# Altium PCB MODULIQ_RF_Detector.PcbDoc (part 1 of 2)
Units mm, origin at the board's own origin, x right, y up, seen from the top; angles counter-clockwise.
Board outline 24 x 76.5 mm, 4 copper layers (L1, P2, L3, L4), stack 1.512 mm thick; 99 components, 100 nets, 366 pads, 199 vias.
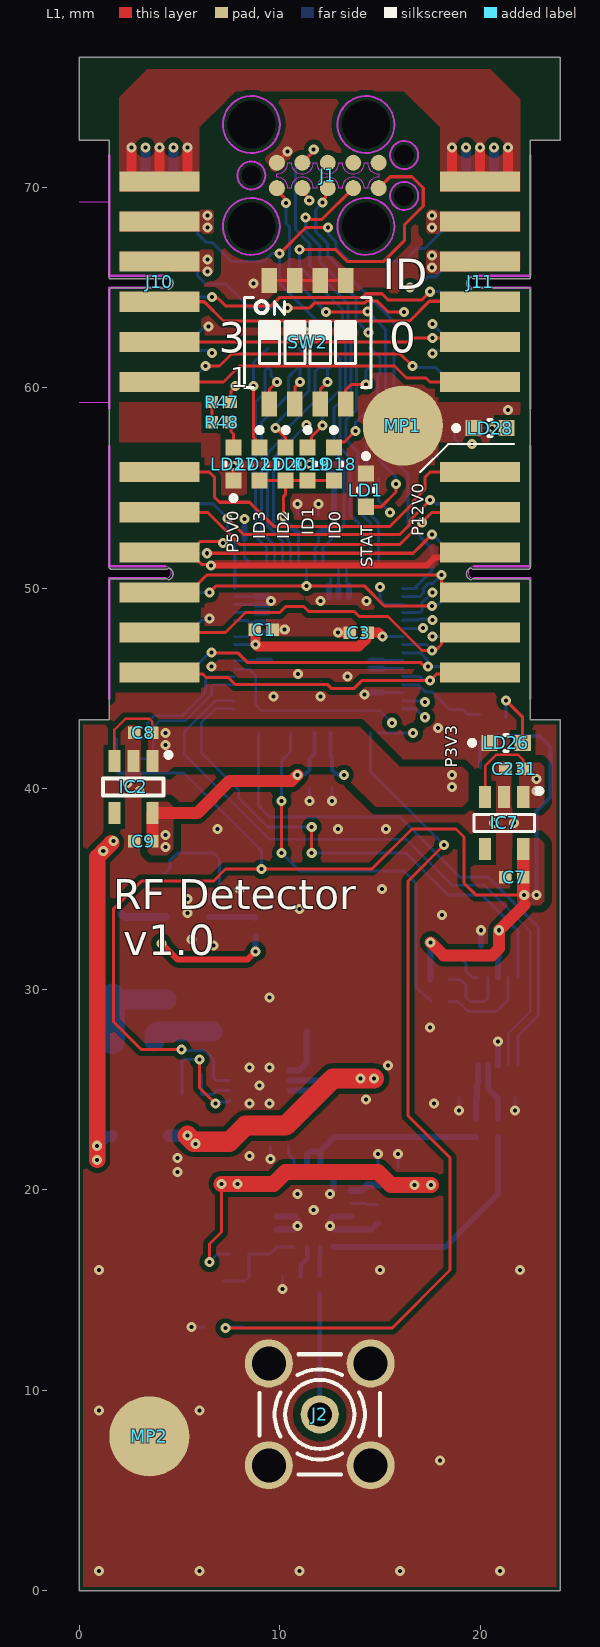
[diagram p0: L1 view]
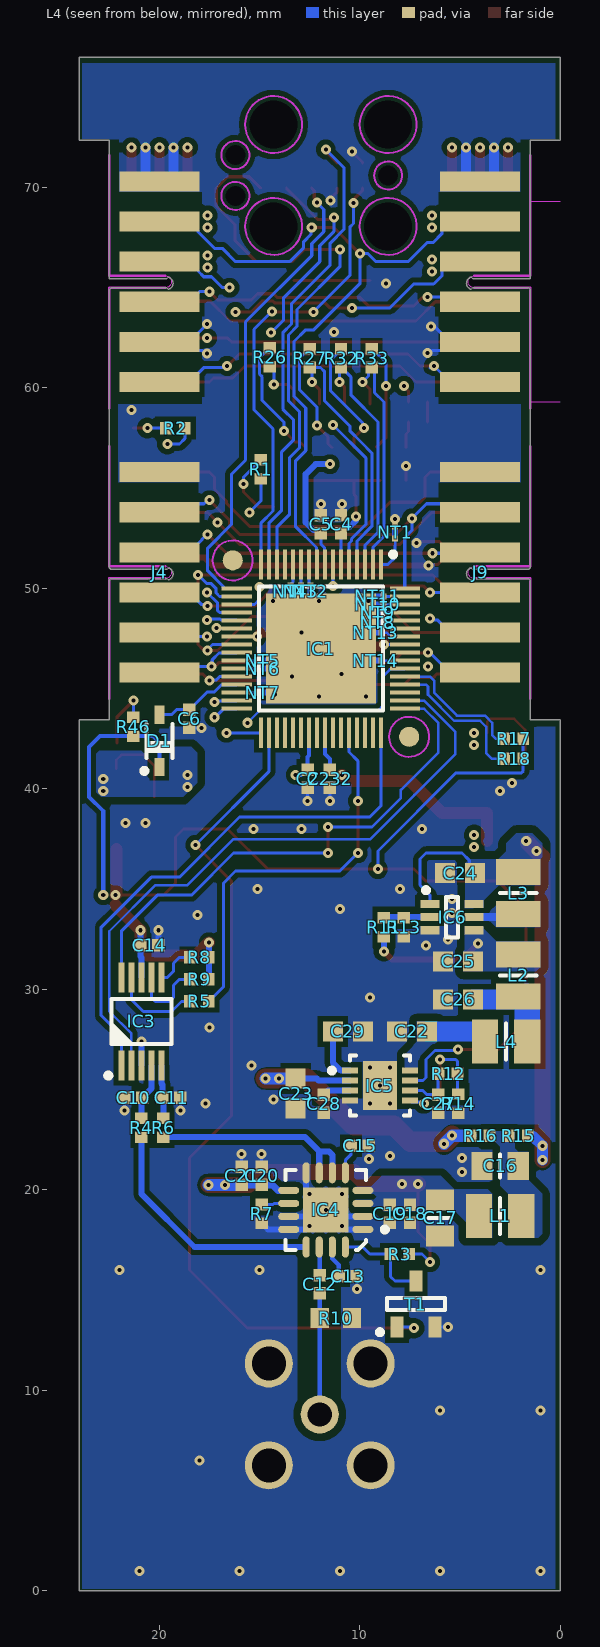
[diagram p1: L4 view, seen from below]
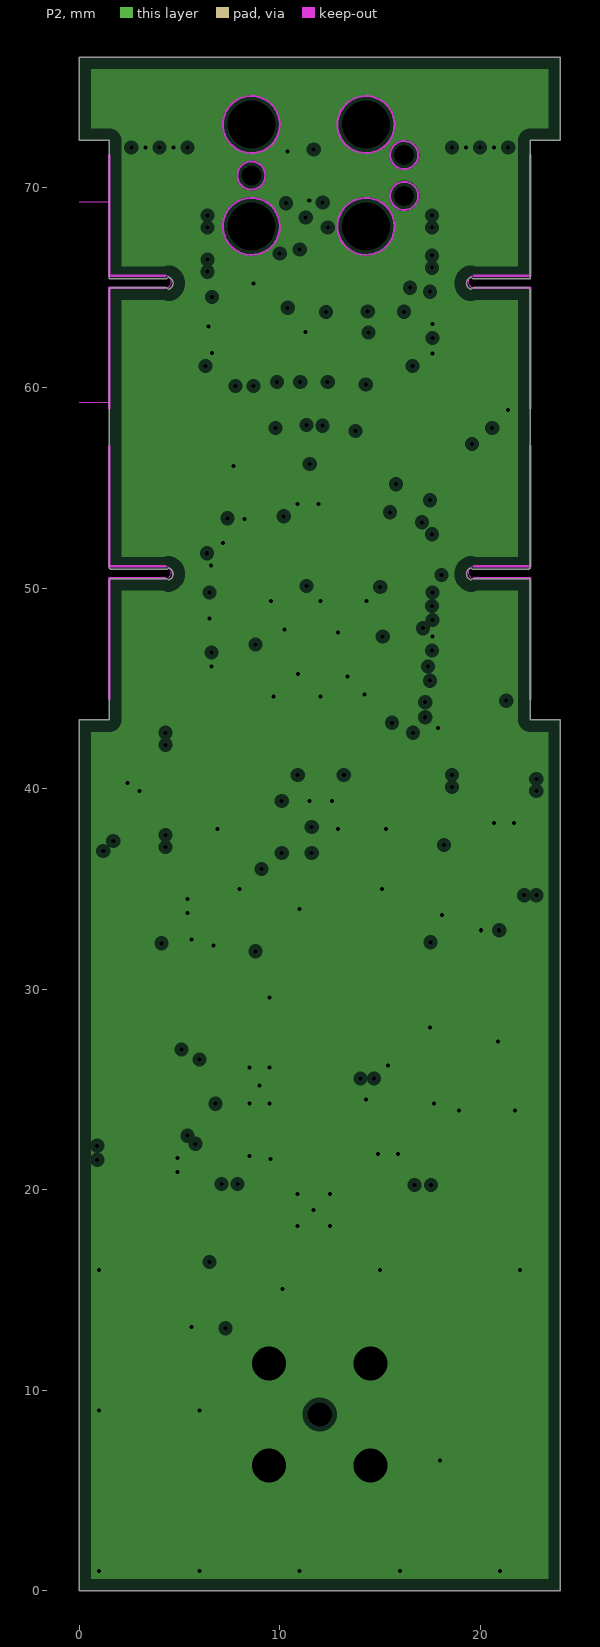
[diagram p2: P2, clearances drawn from the general rule]
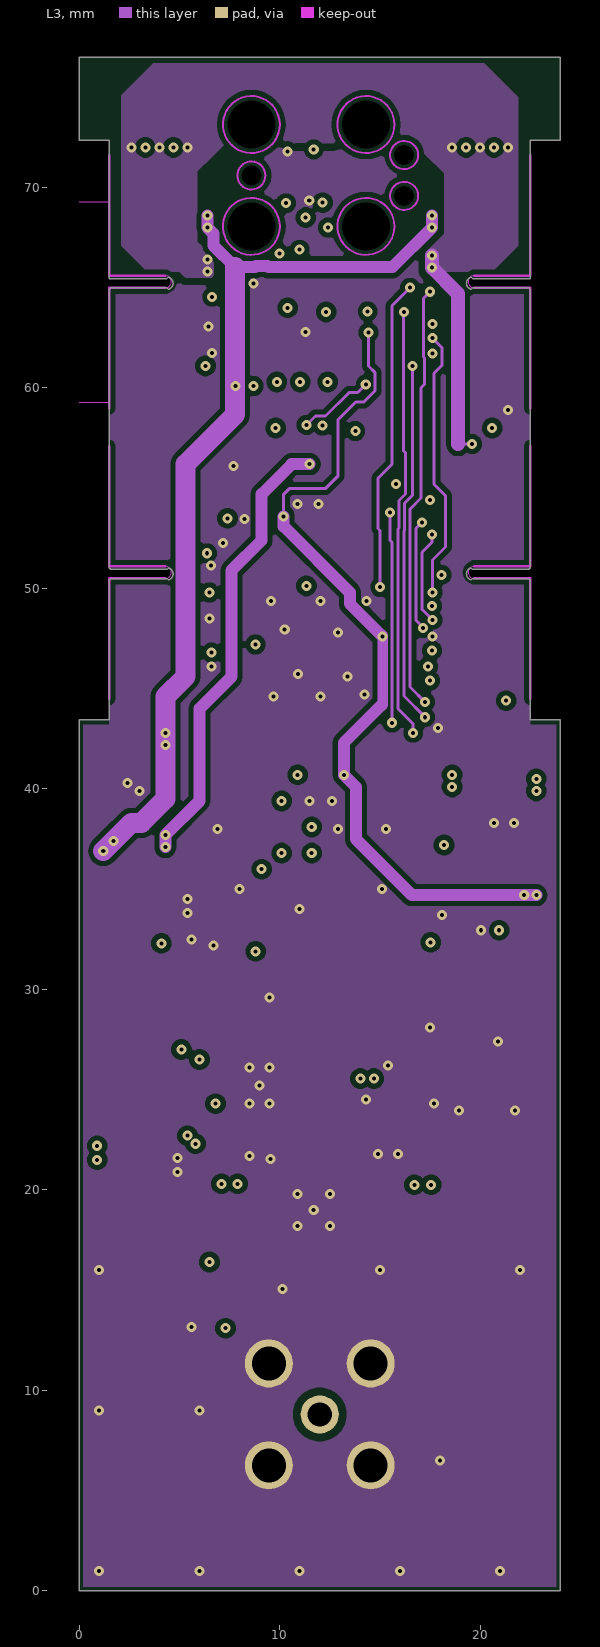
[diagram p3: L3]
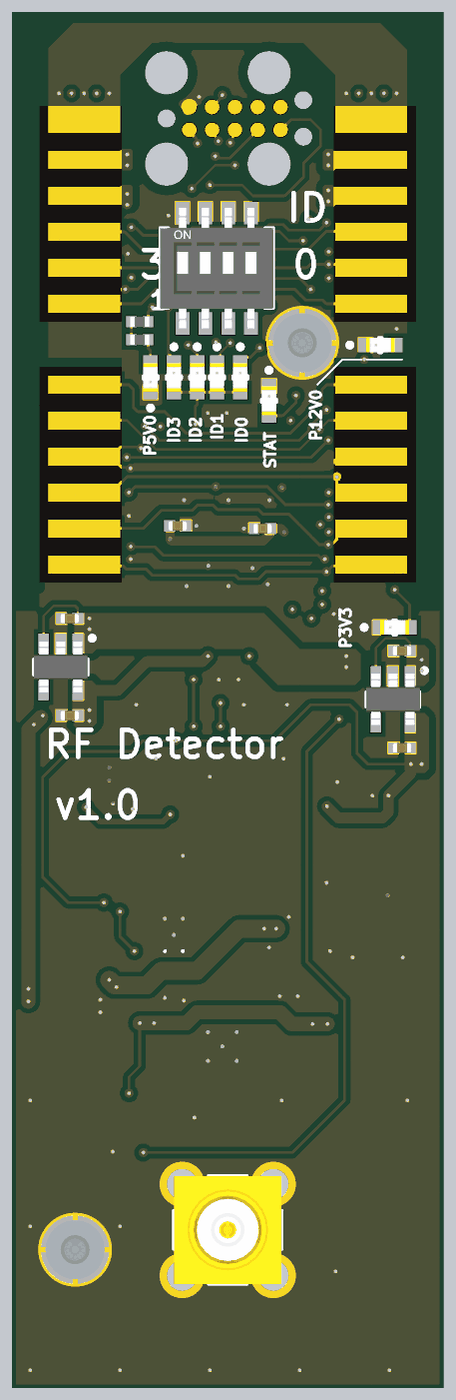
[diagram p5: 3D render of the assembled board from above, using the file's embedded part models]
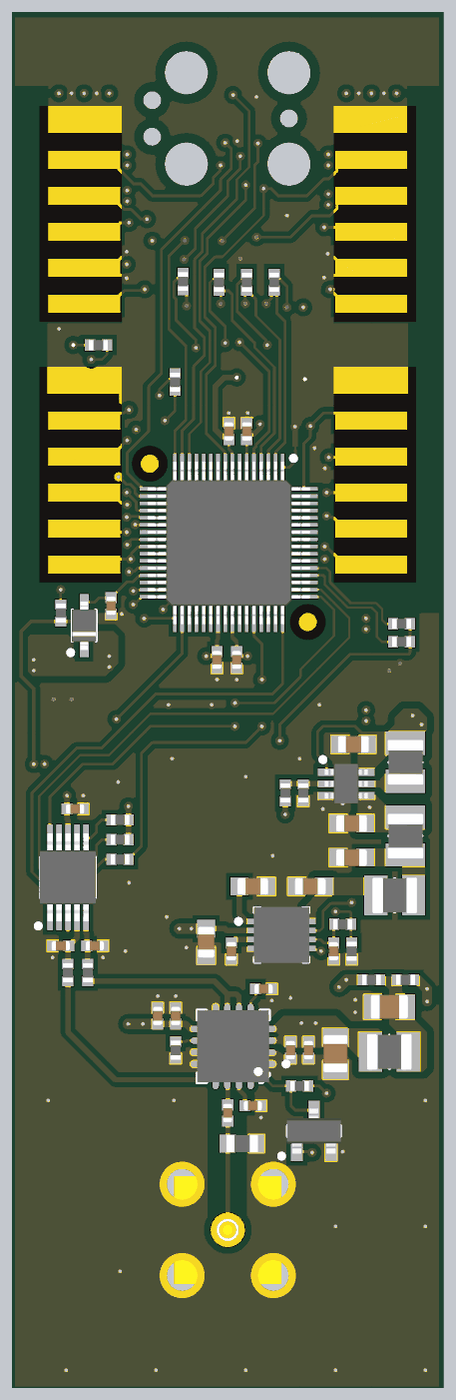
[diagram p6: 3D render of the assembled board from below, using the file's embedded part models]

## Layer stack, top to bottom
TopSolder: solder mask 0.025, Solder Resist, Dk 3.7
L1: signal copper 0.035
Dielectric1: core 0.138, FR-4, Dk 4.3
P2: plane copper 0.018, net GND
Dielectric3: core 1.13, FR-4, Dk 4.6
L3: signal copper 0.018
Dielectric5: core 0.138, FR-4, Dk 4.3
L4: signal copper 0.035
BottomSolder: solder mask 0.025, Solder Resist, Dk 3.7

## Board outline
0,0 0,43.44 1.5,43.44 1.5,50.413 1.577,50.49 4.377,50.49 4.452,50.428 ccw(c4.377,50.723) 4.681,50.723 ccw(c4.377,50.723) 4.452,51.019 4.377,50.957 1.577,50.957 1.5,51.033 1.5,57.023 1.5,64.913 1.577,64.99 4.377,64.99 4.452,64.928 ccw(c4.377,65.223) 4.681,65.223 ccw(c4.377,65.223) 4.452,65.519 4.377,65.457 1.5,65.457 1.5,72.347 0,72.347 0,76.5 24,76.5 24,72.347 22.5,72.347 22.5,65.457 19.623,65.457 19.548,65.519 ccw(c19.623,65.223) 19.319,65.223 ccw(c19.623,65.223) 19.548,64.928 19.623,64.99 22.423,64.99 22.5,64.913 22.5,57.023 22.5,51.033 22.423,50.957 19.623,50.957 19.548,51.019 ccw(c19.623,50.723) 19.319,50.723 ccw(c19.623,50.723) 19.548,50.428 19.623,50.49 22.423,50.49 22.5,50.413 22.5,43.44 24,43.44 24,0

## Design rules (kind name [scope] priority, off if disabled: settings)
Clearance Clearance_DIFF [(InDifferentialPairClass('All Differential Pairs'))] p1: gap=0.127 ignorepadtopadclearanceinfootprint=FALSE except(0: Arc-Hole Track-Hole SMDPad-Hole THPad-Hole Via-Hole Fill-Hole Poly-Hole Region-Hole Text-Hole; 0.254: Arc-Poly Track-Poly SMDPad-Poly THPad-Poly Via-Poly Fill-Poly Poly-Poly Poly-Region Poly-Text)
Clearance [All] p2: gap=0.127 ignorepadtopadclearanceinfootprint=FALSE except(0: Arc-Hole Track-Hole SMDPad-Hole THPad-Hole Via-Hole Fill-Hole Poly-Hole Region-Hole Text-Hole; 0.254: Arc-Poly Track-Poly SMDPad-Poly Via-Poly; 0.381: THPad-Poly Fill-Poly Poly-Poly)
ComponentClearance [All] p1 off: gap=0.254 collisioncheckmode=3 verticalgap=0.254 showdistances=FALSE
DiffPairsRouting [All] p1: maxlimit=0.254 minlimit=0.127 mostfreqgap=0.127 toplayer_minwidth=0.127 toplayer_maxwidth=0.381 toplayer_prefwidth=0.254 midlayer1_minwidth=0.127 midlayer1_maxwidth=0.381 midlayer1_prefwidth=0.254 bottomlayer_minwidth=0.127 bottomlayer_maxwidth=0.381 bottomlayer_prefwidth=0.254 maxuncoupledlength=12.7
FabricationTestPointUsage TestPointUsage [All] p1: valid=0 allowmultiple=FALSE
FabricationTestpoint Testpoint [All] p1: side=3 testpointundercomponent=TRUE minsize=1.016 maxsize=2.54 preferedsize=1.524 minholesize=0.508 maxholesize=1.016 preferedholesize=0.813 testpointgrid=0.025 allowsidetop=TRUE allowsidebottom=TRUE usegrid=TRUE gridtolerance=0
Height [All] p1 off: minheight=0 maxheight=25.4 prefheight=12.7
HoleSize [All] p1: absolutevalues=TRUE maxlimit=3.81 minlimit=0.025 maxpercent=80.000 minpercent=20.000
HoleToHoleClearance [All] p1: gap=0.025 allowstackedmicrovias=TRUE
MinimumSolderMaskSliver [All] p1: minsoldermaskwidth=0
PlaneClearance [All] p1: clearance=0.254
PlaneConnect [All] p1: planeconnectstyle=Direct reliefexpansion=0.508 reliefentries=4 reliefconductorwidth=0.254 reliefairgap=0.254
PolygonConnect [All] p1: connectstyle=Direct reliefconductorwidth=0.254 reliefentries=4 polygonreliefangle="45 Angle" airgapwidth=0.254
PolygonConnect PolygonConnect_pad [(InPadClass('All Pads'))] p2: connectstyle=Relief reliefconductorwidth=0.254 reliefentries=4 polygonreliefangle="90 Angle" airgapwidth=0.254
RoutingVias [All] p1: holewidth=0.2 width=0.5 viastyle="Through Hole" minholewidth=0.2 minwidth=0.5 maxholewidth=1 maxwidth=2
SilkToSilkClearance [All] p1: silktosilkclearance=0
SilkToSolderMaskClearance SilkscreenOverComponentPads [IsPad] p1: minsilkscreentomaskgap=0 clearancetoexposedcopper=TRUE
SolderMaskExpansion [All] p1: expansion=0.051 istentingtop=FALSE
SupplyNets "Schematic Supply Nets_7" [InNet('P5V0A')] p1: voltage=0.000
SupplyNets "Schematic Supply Nets_6" [InNet('P5V0_FLT')] p2: voltage=0.000
SupplyNets "Schematic Supply Nets_5" [InNet('P6V0A')] p3: voltage=0.000
SupplyNets "Schematic Supply Nets_2" [InNet('P1V8')] p4: voltage=0.000
SupplyNets "Schematic Supply Nets_4" [InNet('P5V0')] p5: voltage=0.000
SupplyNets "Schematic Supply Nets_3" [InNet('GND')] p6: voltage=0.000
SupplyNets "Schematic Supply Nets_1" [InNet('P12V0')] p7: voltage=0.000
SupplyNets "Schematic Supply Nets" [InNet('P3V3')] p8: voltage=0.000
Width [All] p1: maxlimit=1.27 minlimit=0.127 preferedwidth=0.127
18 further rules are at their usual default settings.

## Classes and differential pairs
net class S50: NetC12_1 NetC12_2 NetC13_2
component class MODULIQ_RF_Detector: C10 C11 C12 C13 C14 C15 C16 C17 C18 C19 C20 C21 C22 C23 C24 C25 C26 C27 C28 C29 IC3 IC4 IC5 IC6 J2 L1 L2 L3 L4 R3 R4 R5 R6 R7 R8 R9 R10 R11 R12 R13 R14 R15 R16 R17 R18 T1
component class U_SPI_IFC: C1 C2 C3 C4 C5 C6 C7 C8 C9 C231 C232 D1 IC1 IC2 IC7 J1 J4 J9 J10 J11 LD1 LD18 LD19 LD20 LD21 LD26 LD27 LD28 MP1 MP2 NT1 NT2 NT3 NT4 NT5 NT6 NT7 NT8 NT9 NT10 NT11 NT13 NT14 R1 R2 R26 R27 R32 R33 R46 R47 R48 SW2

## Components (designator, comment, footprint, x,y, rotation, side; value= is the part's Value field where it differs from the comment)
C1 "1uF" CAPC1005X55N 9.212,47.947 r180 top
C2 "1uF" CAPC1005X55N 12.6,40.5 r90 bottom
C3 "1uF" CAPC1005X55N 13.943,47.8 r0 top
C4 "1uF" CAPC1005X55N 10.94,53.2 r270 bottom
C5 "1uF" CAPC1005X55N 11.94,53.2 r270 bottom
C6 "1uF" CAPC1005X55N 18.5,43.5 r90 bottom
C7 "1uF" CAPC1005X55N 21.7,35.6 r0 top
C8 "1uF" CAPC1005X55N 3.2,42.8 r0 top
C9 "1uF" CAPC1005X55N 3.2,37.4 r0 top
C10 "4.7nF" CAPC1005X55N 21.3,24.6 r180 bottom
C11 "4.7nF" CAPC1005X55N 19.4,24.6 r0 bottom
C12 "1nF" CAPC1005X55N 12,15.3 r90 bottom
C13 "1nF" CAPC1005X55N 10.6,15.7 r0 bottom
C14 "100nF" CAPC1005X55N 20.5,32.2 r0 bottom
C15 "220pF" CAPC1005X55N 10,22.2 r0 bottom
C16 "10uF" CAPC2012X135N 3,21.2 r180 bottom
C17 "10uF" CAPC2012X135N 6,18.6 r90 bottom
C18 "100nF" CAPC1005X55N 7.5,18.8 r90 bottom
C19 "100pF" CAPC1005X55N 8.5,18.8 r90 bottom
C20 "100pF" CAPC1005X55N 14.9,20.7 r270 bottom
C21 "100nF" CAPC1005X55N 15.9,20.7 r270 bottom
C22 "10uF" CAPC1608X80N 7.4,27.9 r180 bottom
C23 "10uF" CAPC1608X80N 13.2,24.8 r90 bottom
C24 "10uF" CAPC1608X80N 5,35.8 r180 bottom
C25 "10uF" CAPC1608X80N 5.1,31.4 r180 bottom
C26 "10uF" CAPC1608X80N 5.1,29.5 r180 bottom
C27 "1uF" CAPC1005X55N 6.1,24.3 r90 bottom
C28 "1uF" CAPC1005X55N 11.8,24.3 r90 bottom
C29 "10uF" CAPC1608X80N 10.6,27.9 r0 bottom
C231 "1uF" CAPC1005X55N 21.7,41 r0 top
C232 "1uF" CAPC1005X55N 11.5,40.5 r90 bottom
D1 "BAT165" SOD2512X110N 20,42.4 r90 bottom
IC1 "5M160ZE64A5N" QFP40P900X900X120-65N-S550 11.94,47 r270 bottom locked
IC2 "AP2112K-1.8TRG1" SOT95P285X140-5N 2.7,40.1 r270 top
IC3 "ADS1118IDGST" SOP50P490X110-10N 20.9,28.4 r90 bottom
IC4 "AD8318ACPZ" QFN65P400X400X100-17N-S225 11.7,19 r0 bottom
IC5 "ADM7151ACPZ" SON50P300X300X80-9N-R170X244 9,25.2 r180 bottom
IC6 "TPS61222DCKT" SOT65P210X110-6N 5.4,33.6 r180 bottom
IC7 "AP2112K-3.3TRG1" SOT95P285X140-5N 21.2,38.3 r270 top
J1 "TC2050-IDC" TC2050-IDC 12.4,70.6 r0 top
J2 "MCX" AMPHENOL_919-109J-51PX 12,8.8 r0 top
J4 "" EDGE12T1B6_P200W1000L0F100X400 20,50.8 r270 bottom
J9 "" EDGE12T5B10_P200W1000L0F100X400 4,50.8 r90 bottom
J10 "" EDGE12T1B6_P200W1000L0F100X400 4,65.3 r270 top
J11 "" EDGE12T5B10_P200W1000L0F100X400 20,65.3 r90 top
L1 "4.7uH" INDC2520X120N 3,18.7 r0 bottom
L2 "4.7uH" INDC2520X120N 2.1,30.7 r270 bottom
L3 "4.7uH" INDC2520X120N 2.1,34.8 r270 bottom
L4 "4.7uH" INDC2520X120N 2.7,27.4 r0 bottom
LD1 "Green" LED_KINGBRIGHT_KP-1608CGCK 14.3,54.9 r270 top
LD18 "Green" LED_KINGBRIGHT_KP-1608CGCK 12.7,56.2 r270 top
LD19 "Green" LED_KINGBRIGHT_KP-1608CGCK 11.4,56.2 r270 top
LD20 "Green" LED_KINGBRIGHT_KP-1608CGCK 10.3,56.2 r270 top
LD21 "Green" LED_KINGBRIGHT_KP-1608CGCK 9,56.2 r270 top
LD26 "Green" LED_KINGBRIGHT_KP-1608CGCK 21.3,42.3 r0 top
LD27 "Green" LED_KINGBRIGHT_KP-1608CGCK 7.7,56.2 r90 top
LD28 "Green" LED_KINGBRIGHT_KP-1608CGCK 20.5,58 r0 top
MP1 "M1.6 x 3mm" 97730306330 16.15,58.125 r0 top
MP2 "M1.6 x 3mm" 97730306330 3.5,7.7 r0 top
NT1 "Net Tie" "Net Tie 3" 8.24,52.5 r90 bottom net-tie
NT2 "Net Tie" "Net Tie 3" 12.453,50.148 r270 bottom net-tie
NT3 "Net Tie" "Net Tie 3" 12.94,50.148 r270 bottom net-tie
NT4 "Net Tie" "Net Tie 3" 13.463,50.148 r270 bottom net-tie
NT5 "Net Tie" "Net Tie 3" 15.14,46.4 r180 bottom net-tie
NT6 "Net Tie" "Net Tie 3" 15.14,46 r180 bottom net-tie
NT7 "Net Tie" "Net Tie 3" 15.14,44.8 r180 bottom net-tie
NT8 "Net Tie" "Net Tie 3" 8.814,48.3 r0 bottom net-tie
NT9 "Net Tie" "Net Tie 3" 8.814,48.8 r0 bottom net-tie
NT10 "Net Tie" "Net Tie 3" 8.814,49.2 r0 bottom net-tie
NT11 "Net Tie" "Net Tie 3" 8.814,49.6 r0 bottom net-tie
NT13 "Net Tie" "Net Tie 3" 8.914,47.8 r0 bottom net-tie
NT14 "Net Tie" "Net Tie 3" 8.914,46.4 r0 bottom net-tie
R1 "3k3" RESC1005X40N 14.94,55.941 r270 bottom
R2 "10k" RESC1005X40N 19.2,58 r0 bottom
R3 "10k" RESC1005X40N 8,16.8 r180 bottom
R4 "499" RESC1005X40N 20.9,23.1 r90 bottom
R5 "22" RESC1005X40N 18,29.4 r180 bottom
R6 "499" RESC1005X40N 19.8,23.1 r90 bottom
R7 "499" RESC1005X40N 14.9,18.8 r90 bottom
R8 "499" RESC1005X40N 18,31.6 r0 bottom
R9 "499" RESC1005X40N 18,30.5 r0 bottom
R10 "52R3" RESC1608X55N 11.2,13.6 r0 bottom
R11 "36k" RESC1005X40N 8.8,33.1 r270 bottom
R12 "91k" RESC1005X40N 5.6,25.8 r0 bottom
R13 "3k3" RESC1005X40N 7.8,33.1 r90 bottom
R14 "36k" RESC1005X40N 5.1,24.3 r90 bottom
R15 "0" RESC1005X40N 2.1,22.7 r180 bottom
R16 "0" RESC1005X40N 4,22.7 r0 bottom
R17 "3k3" RESC1005X40N 2.32,42.5 r0 bottom
R18 "3k3" RESC1005X40N 2.32,41.5 r0 bottom
R26 "3k3" RESC1005X40N 14.491,61.532 r270 bottom
R27 "3k3" RESC1005X40N 12.493,61.49 r270 bottom
R32 "3k3" RESC1005X40N 10.94,61.49 r270 bottom
R33 "3k3" RESC1005X40N 9.414,61.49 r270 bottom
R46 "3k3" RESC1005X40N 21.3,43.1 r270 bottom
R47 "3k3" RESC1005X40N 7.1,59.3 r0 top
R48 "3k3" RESC1005X40N 7.1,58.3 r180 top
SW2 "Switch" SW_OMRON_A6H-4102 11.39,62.275 r90 top
T1 "2N7002" SOT95P240X130-3N 7.2,14.3 r90 bottom

## Footprints (in the part's own frame and the unit in brackets; to place one, negate y for a bottom-side part, rotate by r counter-clockwise, add the part's x,y. Pads: shape width x height; smd on the part's side, far side on the other; paste and mask are expansions set on the pad)
97730306330 [mm] "SMT Steel Spacer with internal Thread M1.6 Bottom closed, height 3mm"
  round 4 smd paste-2539.97: 1(0,0)
  body extent -1.65,-1.65 1.65,1.65, height 3
AMPHENOL_919-109J-51PX [mm] "50 Ohm, RF Connector, MCX Straight PCB Receptacle Jack"
  round 1.9 hole 1.2: 1(0,0)
  round 2.4 hole 1.7: 2(-2.54,-2.54) 2(-2.54,2.54) 2(2.54,-2.54) 2(2.54,2.54)
  silkscreen extent -3,-3 3,3, body extent -3,-3 3,3, height 6.06
CAPC1005X55N [mm] "Capacitor, Non-Polarized, Chip; 1.00mm L X 0.50mm W X 0.70mm H, IPC Medium Density"
  rect 0.62x0.62 smd: 1(-0.45,0) 2(0.45,0)
  body extent -0.52,-0.27 0.53,0.28, height 0.55
CAPC1608X80N [mm] "Chip Capacitor, Body 1.6x0.8mm IPC Medium Density"
  rect 1x1 smd: 1(-0.75,0) 2(0.75,0)
  body extent -0.87,-0.47 0.88,0.48, height 0.8
CAPC2012X135N [mm] "Chip Capacitor, Body 2.0x1.25mm, IPC Medium Density"
  rect 1.05x1.4 smd: 1(-0.9,0) 2(0.9,0)
  silkscreen extent 0,-0.58 0,0.58, body extent -1.05,-0.67 1.05,0.68, height 1.25
EDGE12T1B6_P200W1000L0F100X400 [mm] "12 contacts Board Edge Connector, First Left Top Pad 1, First Left Bottom Pad 2, Pitch 2mm, Length 0mm, Width 12.5mm, Finger Lenght 4mm, Finger Width 1mm"
  rect 1x4 smd paste-0.5: 1(-5,0) 2(-3,0) 3(-1,0) 4(1,0) 5(3,0) 6(5,0)
  rect 1x4 smd far side paste-0.5: 7(-5,0) 8(-3,0) 9(-1,0) 10(1,0) 11(3,0) 12(5,0)
  KeepOutLayer lines w0.05: 0.3,0.3 ccw(c0,0.3) -0.3,0.3
  KeepOutLayer lines w0.13: 0.3,0.3 0.3,-2.5 6.3,-2.5 ; -0.3,0.3 -0.3,-2.5 -6.3,-2.5
EDGE12T5B10_P200W1000L0F100X400 [mm] "12 contacts Board Edge Connector, First Left Top Pad 5, First Left Bottom Pad 10, Pitch 2mm, Length 0mm, Width 12.5mm, Finger Lenght 4mm, Finger Width 1mm"
  rect 1x4 smd paste-0.5: 1(5,0) 2(3,0) 3(1,0) 4(-1,0) 5(-3,0) 6(-5,0)
  rect 1x4 smd far side paste-0.5: 7(5,0) 8(3,0) 9(1,0) 10(-1,0) 11(-3,0) 12(-5,0)
  KeepOutLayer lines w0.05: -0.3,0.3 cw(c0,0.3) 0.3,0.3
  KeepOutLayer lines w0.13: -6.3,-2.5 -0.3,-2.5 -0.3,0.3 ; 6.3,-2.5 0.3,-2.5 0.3,0.3
INDC2520X120N [mm] "Chip Inductor, EIA 1008, Metric 2520, Body 2.50mm L X 2.00mm W X 1.20mm H body, IPC Medium Density"
  rect 1.3x2.2 smd: 1(-1.05,0) 2(1.05,0)
  silkscreen extent 0,-0.9 0,0.9, body extent -1.25,-1 1.25,1, height 1.2
LED_KINGBRIGHT_KP-1608CGCK [mm] "SMT Green LED, Case 0603, Body L 1.60mm x W 0.80mm x H 1.10mm"
  rect 0.8x0.8 smd: 1(-0.825,0) 2(0.825,0)
  silkscreen extent -1.82,-0.4 0.08,0.4, body extent -0.8,-0.4 0.8,0.4, height 1.1
"Net Tie 3" [mm] "SMD Net Tie"
  rect 0.3x0.3 smd paste-2539.97 mask-0.064: 1(0,0) 2(0.6,0)
  L1 lines w0.3: 0,0 0.6,0
QFN65P400X400X100-17N-S225 [mm] "QFN, 0.65mm pitch,square; 4 pin X 4 pin, 4mm X 4mm X 1mm H body (w/thermal tab 2.25 X 2.25mm),  IPC Medium Density"
  oval 1.05x0.35 smd: 1(-1.85,0.975) 2(-1.85,0.325) 3(-1.85,-0.325) 4(-1.85,-0.975) 9(1.85,-0.975) 10(1.85,-0.325) 11(1.85,0.325) 12(1.85,0.975)
  oval 0.35x1.05 smd: 5(-0.975,-1.85) 6(-0.325,-1.85) 7(0.325,-1.85) 8(0.975,-1.85) 13(0.975,1.85) 14(0.325,1.85) 15(-0.325,1.85) 16(-0.975,1.85)
  rect 2.25x2.25 smd: 17(0,0)
  silkscreen extent -3.07,-2 2,2, body extent -2,-2 2,2, height 1
QFP40P900X900X120-65N-S550 [mm] "QFP, 0.40mm Pitch, Square; 64 Pin, 7.00mm L X 7.00mm W X 1.20mm H Body (w/Thermal Tab), IPC Medium Density"
  rect 1.5x0.2 smd: 1(-4.2,3) 2(-4.2,2.6) 3(-4.2,2.2) 4(-4.2,1.8) 5(-4.2,1.4) 6(-4.2,1) 7(-4.2,0.6) 8(-4.2,0.2) 9(-4.2,-0.2) 10(-4.2,-0.6) 11(-4.2,-1) 12(-4.2,-1.4) 13(-4.2,-1.8) 14(-4.2,-2.2) 15(-4.2,-2.6) 16(-4.2,-3) 33(4.2,-3) 34(4.2,-2.6) 35(4.2,-2.2) 36(4.2,-1.8) 37(4.2,-1.4) 38(4.2,-1) 39(4.2,-0.6) 40(4.2,-0.2) 41(4.2,0.2) 42(4.2,0.6) 43(4.2,1) 44(4.2,1.4) 45(4.2,1.8) 46(4.2,2.2) 47(4.2,2.6) 48(4.2,3)
  rect 0.2x1.5 smd: 17(-3,-4.2) 18(-2.6,-4.2) 19(-2.2,-4.2) 20(-1.8,-4.2) 21(-1.4,-4.2) 22(-1,-4.2) 23(-0.6,-4.2) 24(-0.2,-4.2) 25(0.2,-4.2) 26(0.6,-4.2) 27(1,-4.2) 28(1.4,-4.2) 29(1.8,-4.2) 30(2.2,-4.2) 31(2.6,-4.2) 32(3,-4.2) 49(3,4.2) 50(2.6,4.2) 51(2.2,4.2) 52(1.8,4.2) 53(1.4,4.2) 54(1,4.2) 55(0.6,4.2) 56(0.2,4.2) 57(-0.2,4.2) 58(-0.6,4.2) 59(-1,4.2) 60(-1.4,4.2) 61(-1.8,4.2) 62(-2.2,4.2) 63(-2.6,4.2) 64(-3,4.2)
  rect 5.5x5.5 smd: 65(0,0)
  round 1 smd paste-0.51 mask+0.5: FTG1(-4.4,-4.4) FTG2(4.4,4.4)
  L1 keep-out circle w0.1: c4.4,4.4 r1
  L1 keep-out circle w0.1: c-4.4,-4.4 r1
  silkscreen extent -4.82,-3.1 3.1,3.72, body extent -4.52,-4.52 4.52,4.52, height 1.2
RESC1005X40N [mm] "Chip Resistor, EIA 0402, Metric 1005, Body 1.0x0.5mm, IPC Medium Density"
  rect 0.58x0.62 smd: 1(-0.47,0) 2(0.47,0)
  body extent -0.52,-0.27 0.53,0.28, height 0.4
RESC1608X55N [mm] "Chip Resistor, EIA 0603, Metric 1608, Body 1.6x0.8mm, IPC Medium Density"
  rect 0.9x1 smd: 1(-0.8,0) 2(0.8,0)
  body extent -0.87,-0.47 0.88,0.48, height 0.55
SOD2512X110N [mm] "Small Outline Diode (SOD-323), 1.70mm W X 1.25mm L X 1.10mm H body,  IPC Medium Density"
  rect 0.9x0.5 smd: 1(-1.3,0) 2(1.3,0)
  silkscreen extent -1.62,-0.65 0.85,0.88, body extent -1.35,-0.67 1.35,0.68, height 1.1
SON50P300X300X80-9N-R170X244 [mm] "SON, (DFN) 0.50mm,pitch; 8 pin,3.00mm W X 3.00mm L X 0.80mm H body (w/thermal tab 1.7 X2.44mm), IPC Medium Density"
  rect 0.8x0.3 smd: 1(-1.5,0.75) 2(-1.5,0.25) 3(-1.5,-0.25) 4(-1.5,-0.75) 5(1.5,-0.75) 6(1.5,-0.25) 7(1.5,0.25) 8(1.5,0.75)
  rect 1.7x2.44 smd: 9(0,0)
  silkscreen extent -2.53,-1.5 1.5,1.5, body extent -1.55,-1.55 1.55,1.55, height 0.8
SOP50P490X110-10N [mm] "MSOP, 10-Leads, Body 3.1x3.1mm (max), Pitch 0.50mm, IPC Medium Density"
  rect 1.5x0.3 smd: 1(-2.2,1) 2(-2.2,0.5) 3(-2.2,0) 4(-2.2,-0.5) 5(-2.2,-1) 6(2.2,-1) 7(2.2,-0.5) 8(2.2,0) 9(2.2,0.5) 10(2.2,1)
  silkscreen extent -2.82,-1.5 1.12,1.78, body extent -2.45,-1.55 2.45,1.55, height 1.1
SOT65P210X110-6N [mm] "SOT363, SC70-6, SOT, 0.65mm Pitch, 6 Pin, 1.25mm W X 2.00mm L X 1.10mm H, IPC Medium Density"
  rect 0.95x0.4 smd: 1(-1.1,0.65) 2(-1.1,0) 3(-1.1,-0.65) 4(1.1,-0.65) 5(1.1,0) 6(1.1,0.65)
  silkscreen extent -1.43,-1 0.3,1.47, body extent -1.2,-1.1 1.2,1.1, height 1.1
SOT95P240X130-3N [mm] "SOT23 3-Leads, Pitch 0.95mm - Body 1.3x2.9mm, IPC Medium Density"
  rect 1.05x0.65 smd: 1(-1.15,0.95) 2(-1.15,-0.95) 3(1.15,0)
  silkscreen extent -1.52,-1.45 0.3,1.92, body extent -1.25,-1.5 1.25,1.5, height 1.3
SOT95P285X140-5N [mm] "SOT23, 5-Leads, Body 3.00x2.85mm, Pitch 0.95mm, IPC Medium Density"
  rect 1.1x0.6 smd: 1(-1.3,0.95) 2(-1.3,0) 3(-1.3,-0.95) 4(1.3,-0.95) 5(1.3,0.95)
  silkscreen extent -1.72,-1.5 0.42,1.87, body extent -1.43,-1.5 1.43,1.5, height 1.4
SW_OMRON_A6H-4102 [mm] "Pitch 1.27mm, Body 6.31 x 4.5mm, 4 Ways SPST Surface-Mounting DIP Switch, OMRON A6H"
  rect 1.25x0.76 smd: 1(-3.075,1.905) 2(-3.075,0.635) 3(-3.075,-0.635) 4(-3.075,-1.905) 5(3.075,-1.905) 6(3.075,-0.635) 7(3.075,0.635) 8(3.075,1.905)
  silkscreen extent -2.25,-3.16 2.25,3.16, body extent -3.35,-3.15 3.35,3.16, height 1.55
TC2050-IDC [mm] "TAG-CONNECT IN-CIRCUIT Cable Legged"
  round 0.8 smd paste-0.4: 1(-2.54,-0.635) 2(-1.27,-0.635) 3(0,-0.635) 4(1.27,-0.635) 5(2.54,-0.635) 6(2.54,0.635) 7(1.27,0.635) 8(0,0.635) 9(-1.27,0.635) 10(-2.54,0.635)
  round 0.5 hole 2.4 unplated mask+0.95: Mech(-3.81,-2.54) Mech(-3.81,2.54) Mech(1.905,-2.54) Mech(1.905,2.54)
  round 0.5 hole 1 unplated mask+0.25: Mech(-3.81,0) Mech(3.81,-1.016) Mech(3.81,1.016)
  L1 keep-out region: -2.54,0.085 -2.33,0.127 -2.151,0.246 -2.032,0.425 -1.99,0.635 -1.99,0.635 -1.82,0.635 -1.778,0.425 -1.659,0.246 -1.48,0.127 -1.27,0.085 -1.27,0.085 -1.06,0.127 -0.881,0.246 -0.762,0.425 -0.72,0.635 -0.72,0.635 -0.55,0.635 -0.508,0.425 -0.389,0.246 -0.21,0.127 0,0.085 0,0.085 0.21,0.127 0.389,0.246 0.508,0.425 0.55,0.635 0.55,0.635 0.72,0.635 0.72,0.615 0.76,0.413 0.875,0.241 1.047,0.126 1.25,0.085 1.25,0.085 1.27,0.085 1.481,0.127 1.659,0.246 1.778,0.425 1.82,0.635 1.82,0.635 1.99,0.635 2.032,0.425 2.151,0.246 2.33,0.127 2.54,0.085 2.54,0.085 2.54,-0.085 2.33,-0.127 2.151,-0.246 2.032,-0.425 1.99,-0.635 1.99,-0.635 1.82,-0.635 1.778,-0.425 1.659,-0.246 1.48,-0.127 1.27,-0.085 1.27,-0.085 1.06,-0.127 0.881,-0.246 0.762,-0.425 0.72,-0.635 0.72,-0.635 0.55,-0.635 0.508,-0.425 0.389,-0.246 0.21,-0.127 0,-0.085 0,-0.085 -0.21,-0.127 -0.389,-0.246 -0.508,-0.425 -0.55,-0.635 -0.55,-0.635 -0.72,-0.635 -0.72,-0.615 -0.76,-0.413 -0.875,-0.241 -1.047,-0.126 -1.25,-0.085 -1.25,-0.085 -1.27,-0.085 -1.481,-0.127 -1.659,-0.246 -1.778,-0.425 -1.82,-0.635 -1.82,-0.635 -1.99,-0.635 -2.032,-0.425 -2.151,-0.246 -2.33,-0.127 -2.54,-0.085 -2.54,-0.085

## Part data
C1 C2 C3 C4 C5 C6 C7 C8 C9 C27 C28 C231 C232: library part CC0402_1UF_16V_10%_X5R, "Non-polarised capacitor", Case=0402, Manufacturer=GENERIC, Manufacturer1 ComponentHeight=0.55mm, Manufacturer1 Example=TDK, Manufacturer1 Part Number=C1005X5R1C105KT, Tolerance=±10%, Voltage=16V, Author="CERN DEM JLC", Component Type=Standard, CreateDate=25.10.2012, HelpURL=\\cern.ch\dfs\Applications\Altium\Datasheets\CC0402_X5R_TDK_C.pdf, LatestRevisionDate=25.10.2012, Manufacturer Part Number=CC0402_1UF_16V_10%_X5R, Mounted=Yes, Part Description="SMD Multilayer Chip Ceramic Capacitor", Part Number=CC0402_1UF_16V_10%_X5R, Pin Count=2, Sense=No, SMD=Yes, Socket=No, Status=Preferred, TC=X5R
C10 C11: library part CC0402_4.7NF_16V_10%_X7R, "Non-polarised capacitor", Case=0402, Manufacturer=GENERIC, Manufacturer1 ComponentHeight=0.55mm, Manufacturer1 Example=PHYCOMP, Manufacturer1 Part Number=223878715632, Tolerance=±10%, Voltage=16V, Author="CERN DEM JLC", Component Type=Standard, CreateDate=12/3/2007, HelpURL=\\cern.ch\dfs\Applications\Altium\Datasheets\CC0402_X7R_PHYCOMP.pdf, LatestRevisionDate=12/3/2007, Manufacturer Part Number=CC0402_4.7NF_16V_10%_X7R, Mounted=Yes, Part Description="SMD Multilayer Chip Ceramic Capacitor", Part Number=CC0402_4.7NF_16V_10%_X7R, Pin Count=2, Sense=No, SMD=Yes, Socket=No, Status="Not Recommended", TC=X7R
C12 C13: library part CC0402_1NF_50V_5%_C0G, "Non-polarised capacitor", Case=0402, Manufacturer=GENERIC, Manufacturer1 ComponentHeight=0.55mm, Manufacturer1 Example=KEMET, Manufacturer1 Part Number=C0402C102J5GACTU, Tolerance=±5%, Voltage=50V, Author="CERN DEM BC", Component Type=Standard, CreateDate=9/2/2019, HelpURL="\\cern.ch\dfs\Applications\Altium\Datasheets\CC0402_C0G_KEMET_(Commercial Grade).pdf", LatestRevisionDate=9/2/2019, Manufacturer Part Number=CC0402_1NF_50V_5%_C0G, Mounted=Yes, Part Description="SMD Multilayer Chip Ceramic Capacitor", Part Number=CC0402_1NF_50V_5%_C0G, Pin Count=2, Sense=No, SMD=Yes, Socket=No, Status=Preferred, TC=C0G/NP0
C14 C18 C21: library part CC0402_100NF_16V_10%_X7R, "Non-polarised capacitor", Case=0402, Manufacturer=GENERIC, Manufacturer1 ComponentHeight=0.55mm, Manufacturer1 Example=MURATA, Manufacturer1 Part Number=GRM155R71C104KA88D, Tolerance=±10%, Voltage=16V, Author="CERN DEM JLC", Component Type=Standard, CreateDate=12/5/2013, HelpURL=\\cern.ch\dfs\Applications\Altium\Datasheets\CC0402_X7R_MURATA_GRM.pdf, LatestRevisionDate=12/3/2007, Manufacturer Part Number=CC0402_100NF_16V_10%_X7R, Mounted=Yes, Part Description="SMD Multilayer Chip Ceramic Capacitor", Part Number=CC0402_100NF_16V_10%_X7R, Pin Count=2, Sense=No, SMD=Yes, Socket=No, Status="Not Recommended", TC=X7R
C15: library part CC0402_220PF_50V_1%_C0G, "Non-polarised capacitor", Case=0402, Manufacturer=GENERIC, Manufacturer1 ComponentHeight=0.55mm, Manufacturer1 Example=KEMET, Manufacturer1 Part Number=C0402C221F5GAC, Tolerance=±1%, Voltage=50V, Author="CERN DEM BC", Component Type=Standard, CreateDate=7/14/2020, HelpURL="\\cern.ch\dfs\Applications\Altium\Datasheets\CC0402_C0G_KEMET_(Commercial Grade).pdf", LatestRevisionDate=7/14/2020, Manufacturer Part Number=CC0402_220PF_50V_1%_C0G, Mounted=Yes, Part Description="SMD Multilayer Chip Ceramic Capacitor", Part Number=CC0402_220PF_50V_1%_C0G, Pin Count=2, Sense=No, SMD=Yes, Socket=No, Status=Preferred, TC=C0G/NP0
C16 C17: library part CC0805_10UF_16V_10%_X5R, "Non-polarised capacitor", Case=0805, Manufacturer=GENERIC, Manufacturer1 ComponentHeight=1.4mm, Manufacturer1 Example=KEMET, Manufacturer1 Part Number=C0805C106K4PAC, Tolerance=±10%, Voltage=16V, Author="CERN DEM JLC", Component Type=Standard, CreateDate=03.12.2007, HelpURL=\\cern.ch\dfs\Applications\Altium\Datasheets\CC1206_X5R_KEMET.pdf, LatestRevisionDate=03.12.2007, Manufacturer Part Number=CC0805_10UF_16V_10%_X5R, Mounted=Yes, Part Description="SMD Multilayer Chip Ceramic Capacitor", Part Number=CC0805_10UF_16V_10%_X5R, Pin Count=2, Sense=No, SMD=Yes, Socket=No, Status=Preferred, TC=X5R
C19 C20: library part CC0402_100PF_25V_1%_C0G, "Non-polarised capacitor", Case=0402, Manufacturer=GENERIC, Manufacturer1 ComponentHeight=0.55mm, Manufacturer1 Example=KEMET, Manufacturer1 Part Number=CBR04C101F3GAC, Tolerance=±1%, Voltage=25V, Author="CERN DEM HF", Component Type=Standard, CreateDate=10/20/2022, HelpURL=\\cern.ch\dfs\Applications\Altium\Datasheets\CC0402_C0G_KEMET_HiQ-CBR.pdf, LatestRevisionDate=10/20/2022, Manufacturer Part Number=CC0402_100PF_25V_1%_C0G, Mounted=Yes, Part Description="SMD Multilayer Chip Ceramic Capacitor", Part Number=CC0402_100PF_25V_1%_C0G, Pin Count=2, Sense=No, SMD=Yes, Socket=No, Status="Not Recommended", TC=C0G/NP0
C22 C23 C24 C25 C26 C29: library part CC0603_10UF_10V_10%_X5R, "Non-polarised capacitor", Case=0603, Manufacturer=GENERIC, Manufacturer1 ComponentHeight=0.8mm, Manufacturer1 Example=MURATA, Manufacturer1 Part Number=GRM188R61A106KE69D, Tolerance=±10%, Voltage=10V, Author="CERN DEM JLC", Component Type=Standard, CreateDate=31.01.2017, HelpURL=\\cern.ch\dfs\Applications\Altium\Datasheets\CC0603_MURATA_GRM188R61A106KE69D.pdf, LatestRevisionDate=31.01.2017, Manufacturer Part Number=CC0603_10UF_10V_10%_X5R, Mounted=Yes, Part Description="SMD Multilayer Chip Ceramic Capacitor", Part Number=CC0603_10UF_10V_10%_X5R, Pin Count=2, Sense=No, SMD=Yes, Socket=No, Status=None, TC=X5R
D1: "Schottky Diode", Case=SOD-323, Manufacturer=INFINEON, Power=750mA, Voltage=40V, Author="CERN DEM JLC", Bonding=No, Component Type=Standard, ComponentHeight=1.1mm, CreateDate=12.11.2014, Device=BAT165, HelpURL=\\cern.ch\dfs\Applications\Altium\Datasheets\BAT165.pdf, LatestRevisionDate=12.11.2014, Manufacturer Part Number=BAT165, Mounted=Yes, PackageDescription="Small Outline Diode (SOD-323), 1.70mm W X 1.25mm L X 1.10mm H body,  IPC Medium Density", Part Description="Medium Power AF Schottky Diode", Part Number=BAT165, Pin Count=2, PressFit=No, Sense=No, SMD=Yes, Socket=No
IC1: "MAX V 1.8V CPLD, 54 IOs, 160 Logic Elements, 64-Pin EQFP, Automotive Temperature, Speed Grade 5, Pb-Free", Case=QFP64, Manufacturer=ALTERA, Author="CERN DEM JLC", Bonding=No, Component Type=Standard, ComponentHeight=1.2mm, ComponentLink1Description="Package Drawing", ComponentLink1URL=\\cern.ch\dfs\Applications\Altium\Datasheets\5M160ZE64A5N_Package.pdf, ComponentLink2Description=Pinout, ComponentLink2URL=\\cern.ch\dfs\Applications\Altium\Datasheets\5M160ZE64A5N_Pinout.pdf, CreateDate=07.01.2015, Device=5M160ZE64A5N, HelpURL=\\cern.ch\dfs\Applications\Altium\Datasheets\5M160ZE64A5N.pdf, LatestRevisionDate=27.10.2022, Manufacturer Part Number=5M160ZE64A5N, Mounted=Yes, PackageDescription="QFP, 0.40mm Pitch, Square; 64 pin, 7.00mm L X 7.00mm W X 1.20mm H body (w/Thermal Tab 5.50 X 5.50mm), IPC Medium Density", Part Description="MAX V 1.8V CPLD, 54 IOs, 160 Logic Elements, 64-Pin EQFP, Automotive Temperature, Speed Grade 5, Pb-Free", Part Number=5M160ZE64A5N, Pin Count=65, PressFit=No, Sense=No, SMD=Yes, Socket=No, Status="Not Recommended"
IC2: "600mA CMOS Low Dropout Linear Regulator with Enable", Case=SOT25, Manufacturer="DIODES INCORPORATED", Manufacturer Part Number=AP2112K-1.8, Author="CERN DEM JLC", Bonding=No, Component Type=Standard, ComponentHeight=1.4mm, CreateDate=13.06.2018, Device=AP2112K-1.8TRG1, HelpURL=\\cern.ch\dfs\Applications\Altium\Datasheets\AP2112K-1.8TRG1.pdf, LatestRevisionDate=27.06.2022, Mounted=Yes, PackageDescription="SOT23, 0.95mm Pitch; 5 Pin, 1.6mm W X 3.0mm L X 1.40mm H body, IPC Medium Density", Part Description="1.8V 600mA CMOS Low Dropout Linear Regulator with Enable", Part Number=AP2112K-1.8TRG1, Pin Count=5, PressFit=No, Sense=No, SMD=Yes, Socket=No
IC3: "Quad Channel Single ADC Delta-Sigma 860sps 16-bit Serial 10-Pin VSSOP T/R", Case/Package=VSSOP, Manufacturer="Texas Instruments", Max Operating Temperature=125°C, Max Power Dissipation=900uW, Max Supply Voltage=5.5V, Min Operating Temperature=-40°C, Min Supply Voltage=2V, Operating Supply Voltage=3.3V, Package Quantity=250, Supplier Part Number=595-ADS1118IDGST, Supply Current=150uA, Category="Analog to Digital Converters (ADCs)", ComponentLink1Description=https://datasheet.ciiva.com/7989/1634024-7989312.pdf?src-supplier=Element14, ComponentLink1URL=https://datasheet.ciiva.com/7989/1634024-7989312.pdf?src-supplier=Element14, ComponentLink2Description=https://datasheet.ciiva.com/41461/001186694-da-01-en-ic-adc-16bit-sp-ads1118idgst-msop-10-tid-41461012.pdf?src-supplier=Conrad, ComponentLink2URL=https://datasheet.ciiva.com/41461/001186694-da-01-en-ic-adc-16bit-sp-ads1118idgst-msop-10-tid-41461012.pdf?src-supplier=Conrad, ComponentLink3Description=https://datasheet.ciiva.com/1261/ads1118-1261457.pdf?src-supplier=Digikey, ComponentLink3URL=https://datasheet.ciiva.com/1261/ads1118-1261457.pdf?src-supplier=Digikey, ComponentLink4Description=https://datasheet.ciiva.com/1261/ads1118-1261458.pdf?src-supplier=Digikey, ComponentLink4URL=https://datasheet.ciiva.com/1261/ads1118-1261458.pdf?src-supplier=Digikey, ComponentLink5Description=https://datasheet.ciiva.com/1261/ads1118-1261459.pdf?src-supplier=Digikey, ComponentLink5URL=https://datasheet.ciiva.com/1261/ads1118-1261459.pdf?src-supplier=Digikey, ComponentLink6Description=https://datasheet.ciiva.com/14259/ads1118-14259989.pdf?src-supplier=Avnet, ComponentLink6URL=https://datasheet.ciiva.com/14259/ads1118-14259989.pdf?src-supplier=Avnet, ComponentLink7Description=https://datasheet.ciiva.com/46394/1793017-46394506.pdf?src-supplier=Element14, ComponentLink7URL=https://datasheet.ciiva.com/46394/1793017-46394506.pdf?src-supplier=Element14, ComponentLink8Description=https://datasheet.ciiva.com/46394/1793017-46394507.pdf?src-supplier=Element14, ComponentLink8URL=https://datasheet.ciiva.com/46394/1793017-46394507.pdf?src-supplier=Element14, Contact Plating=Gold, Conversion Rate=860S/s, Height=1.1mm, Integral Nonlinearity (INL)=1LSB, Interface=SPI, Lead Free="Lead Free", Length=3.1mm, Manufacturer Part Number=ADS1118IDGST, Max Supply Voltage (DC)=5.5V, Min Supply Voltage (DC)=2V, Number of A/D Converters=1, Number of Bits=16, Number of Channels=2, Number of Converters=1, Number of Elements=1, Number of Inputs=4, Packaging="Tape and Reel", Pins=10, Polarity=Bipolar, Power Dissipation=900uW, Pricing="1=6.29, 10=4.83, 25=4.47, 50=4.47, 100=4.07, 250=3.87, 500=3.69, 1000=3.59, 2500=3.5, 10000=3.59 (USD)", Reach SVHC Compliant=No, Resolution=16b, RoHS=Yes, RoHS Compliant=Yes, Sampling Rate=860S/s, Series=-, Stock=2422, Supplier=Mouser, Supply Type=Single, Thickness=1.02mm, Width=3.1mm
IC4: "1MHz to 8GHz, 70 dB Logarithmic Detector/Controller", Case=QFN16, Manufacturer="ANALOG DEVICES", Manufacturer Part Number=AD8318ACP, Author="CERN DEM JLC", Bonding=No, Component Type=Standard, ComponentHeight=1mm, CreateDate=1/20/2011, Device=AD8318ACPZ, HelpURL=\\cern.ch\dfs\Applications\Altium\Datasheets\AD8318ACPZ.pdf, LatestRevisionDate=3/25/2022, Mounted=Yes, PackageDescription="QFN, 0.65mm Pitch, Square; 16 Pin, 4.00mm L X 4.00mm W X 1.00mm H body (w/Thermal Tab 2.25 X 2.25mm), IPC Medium Density", Part Description="1MHz to 8GHz, 70 dB Logarithmic Detector/Controller", Part Number=AD8318ACPZ, Pin Count=17, PressFit=No, Sense=No, SMD=Yes, Socket=No
IC5: "800 mA Ultralow Noise, High PSRR, RF Linear Regulator", Case=SON8, Manufacturer="ANALOG DEVICES", Manufacturer Part Number=ADM7151ACP, Author="CERN DEM JLC", Bonding=No, Component Type=Standard, ComponentHeight=0.8mm, CreateDate=23.04.2015, Device=ADM7151ACPZ, HelpURL=\\cern.ch\dfs\Applications\Altium\Datasheets\ADM7151ACPZ.pdf, LatestRevisionDate=31.03.2022, Mounted=Yes, PackageDescription="SON, (DFN) 0.50mm Pitch; 8 pin, 3.00mm W X 3.00mm L X 0.80mm H body (w/Thermal Tab 1.70 X2.44mm), IPC Medium Density", Part Description="Adjustable 1.5V to 5.1V, 800 mA Ultralow Noise, High PSRR, RF Linear Regulator", Part Number=ADM7151ACPZ, Pin Count=9, PressFit=No, Sense=No, SMD=Yes, Socket=No
IC6: "Low Input Voltage, 0.7V Boost Converter With 5.5uA Quiescent Current", Case=SOT363, Manufacturer="TEXAS INSTRUMENTS", Manufacturer Part Number=TPS61222DCK, Author="CERN DEM BC", Bonding=No, Component Type=Standard, ComponentHeight=1.1mm, CreateDate=27.02.2017, Device=TPS61222DCKT, HelpURL=\\cern.ch\dfs\Applications\Altium\Datasheets\TPS61222DCKT.pdf, LatestRevisionDate=13.06.2022, Mounted=Yes, PackageDescription="SOT353, SC70-6, 0.65mm Pitch; 6 Pin, 1.25mm W X 2.00mm L X 1.10mm H body, IPC Medium Density", Part Description="Low Input Voltage, 0.7V Boost Converter with 5.5uA Quiescent Current", Part Number=TPS61222DCKT, Pin Count=6, PressFit=No, Sense=No, SMD=Yes, Socket=No
IC7: "600mA CMOS Low Dropout Linear Regulator with Enable", Case=SOT25, Manufacturer="DIODES INCORPORATED", Manufacturer Part Number=AP2112K-3.3, Author="CERN DEM MR", Bonding=No, Component Type=Standard, ComponentHeight=1.4mm, CreateDate=13.12.2017, Device=AP2112K-3.3TRG1, HelpURL=\\cern.ch\dfs\Applications\Altium\Datasheets\AP2112K-3.3TRG1.pdf, LatestRevisionDate=27.06.2022, Mounted=Yes, PackageDescription="SOT23, 0.95mm Pitch; 5 Pin, 1.6mm W X 3.0mm L X 1.40mm H body, IPC Medium Density", Part Description="3.3V 600mA CMOS Low Dropout Linear Regulator with Enable", Part Number=AP2112K-3.3TRG1, Pin Count=5, PressFit=No, Sense=No, SMD=Yes, Socket=No
J1: "TC2030-MCP and TC2050-IDC Pad Contact", Author="CERN DEM HF", Component Type="Standard (No BOM)", ComponentHeight=0mm, CreateDate=02.05.2024, Family=TC2050-IDC, HelpURL=\\cern.ch\dfs\Applications\Altium\Datasheets\TC2050-IDC.pdf, LatestRevisionDate=02.05.2024, Mounted=No, PackageDescription="10 X 31mil Diameter SMD Pad For TC2030-MCP Legged Connector", Part Description="10 X 31mil Diameter SMD Pad For TC2050-IDC Legged Connector", Part Number=TC2050-IDC, Pin Count=10, Sense=No, SMD=Yes, Socket=No, Status=None
J2: library part AMPHENOL_919-109J-51PX, Manufacturer=AMPHENOL, Manufacturer Part Number="919-109J-51PX (MCX6251B1-3GT30G-50)", Author="CERN DEM BC", Component Type=Standard, ComponentHeight=6.06mm, CreateDate=31.01.2019, Family=MCX, HelpURL=\\cern.ch\dfs\Applications\Altium\Datasheets\AMPHENOL_919-109J-51PX.pdf, LatestRevisionDate=31.01.2019, Mounted=Yes, Part Description="50 Ohms, RF Connector, MCX Straight PCB Receptacle Jack", Part Number=AMPHENOL_919-109J-51PX, Pin Count=5, PressFit=No, Sense=No, SMD=No, Socket=No, Status=None
J4 J10: library part "PCB Edge Connector 12 (2x6)", "PCB Edge Connector 12 (2x6)", Part Number=EDGE10T1B6_P200W1000L0F100X400, Author="CERN DEM MR", Component Type="Standard (No BOM)", ComponentHeight=0mm, CreateDate=14.02.2018, HelpURL=\\cern.ch\dfs\Applications\Altium\Datasheets\EDGE10T1B6_P200W1000L0F100X400.pdf, LatestRevisionDate=14.02.2018, Mounted=No, Part Description="10 Contacts Board Edge Connector, Pitch 2mm, Length 0mm, Width 10mm, Finger Lenght 4mm, Finger Width 1mm", Pin Count=12, PressFit=No, Sense=No, SMD=No, Socket=No, Status=None
J9 J11: library part "PCB Edge Connector 12 (2x6) R", "PCB Edge Connector 12 (2x6)", Part Number=EDGE12T5B10_P200W1000L0F100X400, Author=GK, Component Type="Standard (No BOM)", ComponentHeight=0mm, CreateDate=14.02.2018, HelpURL=\\cern.ch\dfs\Applications\Altium\Datasheets\EDGE10T5B10_P200W1000L0F100X400.pdf, LatestRevisionDate=14.02.2018, Mounted=No, Part Description="12 Contacts Board Edge Connector, Pitch 2mm, Length 0mm, Width 10mm, Finger Lenght 4mm, Finger Width 1mm", Pin Count=12, PressFit=No, Sense=No, SMD=No, Socket=No, Status=None
L1 L2 L3 L4: library part IND1008_4.7UH_20%_MURATA_DFE252012P, "Inductor", Case=1008, Manufacturer=MURATA, Manufacturer Part Number=DFE252012P-4R7M, Power=2A, Resistance=0.2R, Tolerance=±20%, Author="CERN DEM BC", Component Type=Standard, ComponentHeight=1.2mm, CreateDate=03.09.2020, HelpURL=\\cern.ch\dfs\Applications\Altium\Datasheets\IND_MURATA_DFE252012P-4R7M.pdf, LatestRevisionDate=03.09.2020, Mounted=Yes, Part Description="Metal Alloy Power Inductor (DFE252012P Series)", Part Number=IND1008_4.7UH_20%_MURATA_DFE252012P, Pin Count=2, Sense=No, SMD=Yes, Socket=No
LD1 LD18 LD19 LD20 LD21 LD26 LD27 LD28: library part LED_KINGBRIGHT_KP-1608CGCK, "LED Green 1C 2A", Case=0603, Manufacturer=KINGBRIGHT, Manufacturer Part Number=KP-1608CGCK, Author="CERN DEM HF", Bonding=No, Color=Green, Component Type=Standard, ComponentHeight=1.1mm, CreateDate=01.10.2021, HelpURL=\\cern.ch\dfs\Applications\Altium\Datasheets\LED_KINGBRIGHT_KP-1608CGCK.pdf, LatestRevisionDate=01.10.2021, Mounted=Yes, PackageDescription="SMT Green LED, Case 0603, Body L 1.60mm x W 0.80mm x H 1.10mm", Part Description="1.6x0.8mm SMD Chip Green LED Lamp", Part Number=LED_KINGBRIGHT_KP-1608CGCK, Pin Count=2, PressFit=No, Sense=No, SMD=Yes, Socket=No
MP1 MP2: library part 97730306330R, "WA-SMSI SMT Steel Spacer with internal Thread Bottom closed, OD 3.3mm, M1.6 x 3mm", Manufacturer="Wurth Elektronik", Operating Temperature Max=150°C, Operating Temperature Min=-55°C, Category="SMT Spacers", ComponentLink1Description="Website Link", ComponentLink1URL=https://www.we-online.com/redexpert/article/97730306330R?ad, ComponentLink2Description="Datasheet Link", ComponentLink2URL=https://www.we-online.com/redexpert/spec/97730306330R?ad, Height=3mm, Inside Thread Length=1.8mm, Manufacturer Part Number=97730306330R, Match Code=WA-SMSI, Material=Steel, Mount="Surface Mount", Outside Diameter=3.3mm, Packaging="Tape and Reel", Surface=Tin, Thread Size=M1.6
NT1 NT2 NT3 NT4 NT5 NT6 NT7 NT8 NT9 NT10 NT11 NT13 NT14: library part "Net Tie 3", Author="CERN DEM HF", Component Type="Net Tie", ComponentHeight=0mm, CreateDate=23.09.2024, Family="Net Tie", HelpURL=Undefined, LatestRevisionDate=23.09.2024, Mounted=No, PackageDescription="SMD Net Tie", Part Description="Net Tie (2 Nets)", Part Number="Net Tie 3", Pin Count=2, Sense=No, SMD=No, Socket=No, Status=None
R1 R13 R17 R18 R26 R27 R32 R33 R46 R47 R48: library part R0402_3K3_1%_0.0625W_100PPM, "Resistor - 1%", Case=0402, Manufacturer=GENERIC, Manufacturer1 ComponentHeight=0.4mm, Manufacturer1 Example="YAGEO PHYCOMP", Manufacturer1 Part Number=232270673302L, Power=0.0625W, Tolerance=±1%, Author="CERN DEM JLC", Component Type=Standard, CreateDate=03.12.2007, HelpURL=\\cern.ch\dfs\Applications\Altium\Datasheets\R0402_Phycomp_RC0402.pdf, LatestRevisionDate=17.10.2012, Manufacturer Part Number=R0402_3K3_1%_0.0625W_100PPM, Mounted=Yes, Part Description="General Purpose Thick Film Chip Resistor", Part Number=R0402_3K3_1%_0.0625W_100PPM, Pin Count=2, PressFit=No, Sense=No, SMD=Yes, Socket=No, Status="Not Recommended", TC=±100ppm/°C
R2 R3: library part R0402_10K_1%_0.0625W_100PPM, "Resistor - 1%", Case=0402, Manufacturer=GENERIC, Manufacturer1 ComponentHeight=0.4mm, Manufacturer1 Example="YAGEO PHYCOMP", Manufacturer1 Part Number=232270671003L, Power=0.0625W, Tolerance=±1%, Author="CERN DEM JLC", Component Type=Standard, HelpURL=\\cern.ch\dfs\Applications\Altium\Datasheets\R0402_Phycomp_RC0402.pdf, Manufacturer Part Number=R0402_10K_1%_0.0625W_100PPM, Mounted=Yes, Part Description="General Purpose Thick Film Chip Resistor", Part Number=R0402_10K_1%_0.0625W_100PPM, Pin Count=2, PressFit=No, Sense=No, SMD=Yes, Socket=No, Status="Not Recommended", TC=±100ppm/°C
  R2: CreateDate=03.12.2007, LatestRevisionDate=17.10.2012
  R3: CreateDate=12/3/2007, LatestRevisionDate=10/17/2012
R4 R6 R7 R8 R9: library part R0402_499R_1%_0.1W_100PPM, "Resistor - 1%", Case=0402, Manufacturer=GENERIC, Manufacturer1 ComponentHeight=0.4mm, Manufacturer1 Example=PANASONIC, Manufacturer1 Part Number=ERJ2RKF4990X, Power=0.1W, Tolerance=±1%, Voltage=50V, Author="CERN DEM MR", Component Type=Standard, CreateDate=11/22/2016, HelpURL=\\cern.ch\dfs\Applications\Altium\Datasheets\R0402_PANASONIC_ERJ2RK.pdf, LatestRevisionDate=11/22/2016, Manufacturer Part Number=R0402_499R_1%_0.1W_100PPM, Mounted=Yes, Part Description="General Purpose Thick Film Chip Resistor", Part Number=R0402_499R_1%_0.1W_100PPM, Pin Count=2, PressFit=No, Sense=No, SMD=Yes, Socket=No, Status="Not Recommended", TC=±100ppm/°C
R5: library part R0402_22R_1%_0.0625W_100PPM, "Resistor - 1%", Case=0402, Manufacturer=GENERIC, Manufacturer1 ComponentHeight=0.4mm, Manufacturer1 Example="YAGEO PHYCOMP", Manufacturer1 Part Number=232270672209L, Power=0.0625W, Tolerance=±1%, Author="CERN DEM JLC", Component Type=Standard, CreateDate=12/3/2007, HelpURL=\\cern.ch\dfs\Applications\Altium\Datasheets\R0402_Phycomp_RC0402.pdf, LatestRevisionDate=10/17/2012, Manufacturer Part Number=R0402_22R_1%_0.0625W_100PPM, Mounted=Yes, Part Description="General Purpose Thick Film Chip Resistor", Part Number=R0402_22R_1%_0.0625W_100PPM, Pin Count=2, PressFit=No, Sense=No, SMD=Yes, Socket=No, Status="Not Recommended", TC=±100ppm/°C
R10: library part R0603_52R3_0.1%_0.063W_10PPM, "Resistor - 0.1%", Case=0603, Manufacturer=GENERIC, Manufacturer1 ComponentHeight=0.5mm, Manufacturer1 Example="TYCO HOLSWORTHY", Manufacturer1 Part Number=RN73C1J52R3BTG, Power=0.063W, Tolerance=±0.1%, Author="CERN DEM JLC", Component Type=Standard, CreateDate=3/16/2011, HelpURL=\\cern.ch\dfs\Applications\Altium\Datasheets\R0603_Tyco_RN73.pdf, LatestRevisionDate=3/16/2011, Manufacturer Part Number=R0603_52R3_0.1%_0.063W_10PPM, Mounted=Yes, Part Description="Thin Film Chip Resistor", Part Number=R0603_52R3_0.1%_0.063W_10PPM, Pin Count=2, PressFit=No, Sense=No, SMD=Yes, Socket=No, Status="Not Recommended", TC=±10ppm
R11 R14: library part R0402_36K_1%_0.0625W_100PPM, "Resistor - 1%", Case=0402, Manufacturer=GENERIC, Manufacturer1 ComponentHeight=0.4mm, Manufacturer1 Example="YAGEO PHYCOMP", Manufacturer1 Part Number=232270673603L, Power=0.0625W, Tolerance=±1%, Author="CERN DEM JLC", Component Type=Standard, CreateDate=03.12.2007, HelpURL=\\cern.ch\dfs\Applications\Altium\Datasheets\R0402_Phycomp_RC0402.pdf, LatestRevisionDate=17.10.2012, Manufacturer Part Number=R0402_36K_1%_0.0625W_100PPM, Mounted=Yes, Part Description="General Purpose Thick Film Chip Resistor", Part Number=R0402_36K_1%_0.0625W_100PPM, Pin Count=2, PressFit=No, Sense=No, SMD=Yes, Socket=No, Status="Not Recommended", TC=±100ppm/°C
R12: library part R0402_91K_1%_0.0625W_100PPM, "Resistor - 1%", Case=0402, Manufacturer=GENERIC, Manufacturer1 ComponentHeight=0.4mm, Manufacturer1 Example="YAGEO PHYCOMP", Manufacturer1 Part Number=232270679103L, Power=0.0625W, Tolerance=±1%, Author="CERN DEM JLC", Component Type=Standard, CreateDate=03.12.2007, HelpURL=\\cern.ch\dfs\Applications\Altium\Datasheets\R0402_Phycomp_RC0402.pdf, LatestRevisionDate=17.10.2012, Manufacturer Part Number=R0402_91K_1%_0.0625W_100PPM, Mounted=Yes, Part Description="General Purpose Thick Film Chip Resistor", Part Number=R0402_91K_1%_0.0625W_100PPM, Pin Count=2, PressFit=No, Sense=No, SMD=Yes, Socket=No, Status="Not Recommended", TC=±100ppm/°C
R15 R16: library part R0402_0R_JUMPER, "Resistor", Case=0402, Manufacturer=GENERIC, Manufacturer1 ComponentHeight=0.4mm, Manufacturer1 Example="YAGEO PHYCOMP", Manufacturer1 Part Number=232270591001L, Author="CERN DEM JLC", Component Type=Standard, CreateDate=12/3/2007, HelpURL=\\cern.ch\dfs\Applications\Altium\Datasheets\R0402_Phycomp_RC0402.pdf, LatestRevisionDate=10/17/2012, Manufacturer Part Number=R0402_0R_JUMPER, Mounted=Yes, Part Description="1A (0.05R Max DC Resistance) Zero Ohm Jumper", Part Number=R0402_0R_JUMPER, Pin Count=2, PressFit=No, Sense=No, SMD=Yes, Socket=No, Status="Not Recommended"
SW2: library part SW_OMRON_A6H-4102, "4 Ways SPST DIP Switch", Manufacturer=OMRON, Manufacturer Part Number=A6H-4102, Author="CERN DEM JLC", Component Type=Standard, ComponentHeight=1.45mm, CreateDate=17.12.2013, Family=Switch, HelpURL=\\cern.ch\dfs\Applications\Altium\Datasheets\SW_OMRON_A6H-4102.pdf, LatestRevisionDate=17.12.2013, Mounted=Yes, PackageDescription="Pitch 1.27mm, Body 6.31 x 4.5mm, 4 Ways SPST Surface-Mounting DIP Switch, OMRON A6H", Part Description="4 Ways Ultra-low Profile, Half-pitch, SPST DIP Switch with Seal Tape, Rating 25mA 24VDC", Part Number=SW_OMRON_A6H-4102, Pin Count=8, PressFit=No, Sense=No, SMD=Yes, Socket=No, Status=None
T1: "N-CHANNEL MOSFET WITH DIODE", Case=SOT23-3, Manufacturer="FAIRCHILD SEMICONDUCTOR", Author="CERN DEM JLC", Bonding=No, Component Type=Standard, ComponentHeight=1.3mm, CreateDate=8/20/2008, Device=2N7002, HelpURL=\\cern.ch\dfs\Applications\Altium\Datasheets\2N7002.pdf, LatestRevisionDate=4/7/2009, Manufacturer Part Number=2N7002, Mounted=Yes, PackageDescription="SOT23, 0.95mm Pitch; 3 Pin, 1.30mm W X 2.90mm L X 1.30mm H body, IPC Medium Density", Part Description="60V, 280mA, N-Channel Enhancement Mode Field Effect Transistor (FET)", Part Number=2N7002, Pin Count=3, PressFit=No, Sense=No, SMD=Yes, Socket=No

## Via types
v1: diameter 0.5, hole 0.2, L1 to L4, tented both sides, 188 vias
v2: diameter 0.5, hole 0.2, L1 to L4, 11 vias

## Nets (pads, with @x,y where several pads share a name; then routed paths per layer and width w, separated by ;. In a path a pad name is that pad's centre, name@x,y a point inside that pad or via, vN(x,y) a via of type N, cw(c..) or ccw(c..) an arc to the next point about the centre after c; other vN are vias at no path point)
AIN0: C10.2 IC3.4 R4.2 | length 2.8
  L4 w0.3: IC3.4@20.4,26.2 20.4,25.05 C10.2@20.85,24.6 20.9,24.55 R4.2@20.9,23.57
AIN1: C11.2 IC3.5 R6.2 | length 2.7
  L4 w0.3: R6.2@19.8,23.57 19.8,24.55 C11.2@19.85,24.6 19.85,25.25 19.9,25.3 IC3.5@19.9,26.2
CS_ID0: IC1.5 R26.2 SW2.4 | length 14.6
  L1 w0.15: SW2.4@13.295,59.2 13.295,59.895 13.575,60.175 v1(14.295,60.175)
  L3 w0.15: v1(11.34,58.157) 11.783,58.6 12.29,58.6 13.467,59.777 13.893,59.777 14.291,60.175 v1(14.295,60.175)
  L4 w0.15: IC1.5@10.54,51.2 10.54,52.244 10.417,52.367 10.417,52.475 9.7,53.192 9.7,56.517 v1(11.34,58.157) ; v1(14.295,60.175) 14.295,60.865 R26.2@14.491,61.062
CS_ID1: IC1.4 R27.2 SW2.3 | length 13.7
  L1 w0.15: SW2.3@12.025,59.2 12.025,59.931 v1(12.394,60.3)
  L4 w0.15: IC1.4@10.14,51.2 10.14,52.36 9.4,53.1 9.4,56.761 9.939,57.3 10.5,57.861 10.5,58.1 11.751,59.351 11.751,60.813 11.958,61.02 R27.2@12.493,61.02 12.394,60.921 v1(12.394,60.3)
CS_ID2: IC1.3 R32.2 SW2.2 | length 12.8
  L1 w0.15: SW2.2@10.755,59.2 10.755,60.033 v1(11.022,60.3)
  L4 w0.15: IC1.3@9.74,51.2 9.74,52.16 9.1,52.8 9.1,58.3 10.432,59.632 10.432,60.532 10.92,61.02 R32.2@10.94,61.02 11.022,60.937 v1(11.022,60.3)
CS_ID3: IC1.2 R33.2 SW2.1 | length 12.5
  L1 w0.15: SW2.1@9.485,59.2 9.485,59.925 v1(9.86,60.3)
  L4 w0.15: IC1.2@9.34,51.2 9.34,52.06 8.8,52.6 8.8,59.3 9.264,59.764 9.264,60.87 R33.2@9.414,61.02 9.564,60.869 9.564,60.596 v1(9.86,60.3)
ENBL: IC4.16 R3.1 T1.3 | length 4.9
  L4 w0.15: T1.3@7.2,15.45 8.25,15.45 8.47,15.67 R3.1@8.47,16.8 9.5,16.8 9.85,17.15 IC4.16@10.725,17.15
GND: C1.1 C2.1 C3.1 C4.1 C5.1 C6.1 C7.1 C8.1 C9.1 C10.1 C11.1 C13.1 C14.1 C15.1 C16.1 C17.1 C18.1 C19.1 C20.1 C21.1 C22.1 C23.1 C24.1 C25.1 C26.1 C27.1 C28.1 C29.1 C231.1 C232.1 IC1.65 IC2.2 IC3.3 IC4.1 IC4.2 IC4.8 IC4.11 IC4.12 IC4.17 IC5.4 IC5.9 IC6.3 IC7.2 J1.2 J1.10 J2.2 J4.1 J4.5 J4.9 J9.1 J9.5 J9.9 J10.7 J10.11 J11.7 J11.11 LD1.1 LD26.1 LD27.1 LD28.1 MP1.1 MP2.1 NT1.2 NT2.2 NT3.2 NT4.2 NT5.2 NT6.2 NT7.2 NT8.2 NT9.2 NT10.2 NT11.2 NT13.2 NT14.2 R7.1 R10.1 R13.1 R14.1 SW2.5 SW2.6 SW2.7 SW2.8 T1.2 | length 66.1
  L1 w0.15: J9.9@4,51.8 J9.9@5.5,51.8 ; v1(6.585,51.15) 6.546,51.19 6.11,51.19 J9.9@5.5,51.8 ; v1(7.167,52.274) 7.104,52.338 6.038,52.338 J9.9@5.5,51.8 ; LD27.1@7.7,55.375 v1(7.7,56.1) ; SW2.8@9.485,65.35 SW2.5@13.295,65.35
  L1 w0.152: J1.10@9.86,71.235 9.86,71.247 10.4,71.787 v1(10.4,71.8) ; J1.2@11.13,69.965 11.13,69.79 11.409,69.511 11.409,69.407 v1(11.476,69.34)
  L1 w0.3: v1(6.585,51.15) 17.35,51.15 17.732,51.532 19.732,51.532 J4.9@20,51.8
  L1 w0.5: C1.1@9.662,47.947 v1(10.253,47.947) ; v1(12.901,47.8) C3.1@13.493,47.8
  L4 w0.15: J9.5@4,47.8 5.5,47.8 6.133,48.433 6.427,48.433 v1(6.494,48.5) ; v1(5.6,13.15) T1.2@6.25,13.15 ; v1(9.55,21.55) C15.1@9.55,22.2 ; v1(10.15,15.05) C13.1@10.15,15.7 ; v1(10.888,54.224) 10.888,53.702 C4.1@10.94,53.65 ; v1(11.5,39.4) C232.1@11.5,40.05 ; C5.1@11.94,53.65 v1(11.94,54.224) ; v1(12.6,39.4) C2.1@12.6,40.05 ; C20.1@14.9,21.15 v1(14.9,21.8) ; C21.1@15.9,21.15 v1(15.9,21.8) ; v1(17.623,47.6) 19.8,47.6 J4.5@20,47.8 ; v1(17.9,43.05) C6.1@18.5,43.05 ; v1(18.95,23.95) C11.1@18.95,24.6 ; v1(21.75,23.95) C10.1@21.75,24.6
  L4 w0.152: v1(6.439,63.076) 6.373,63.009 6.209,63.009 5.5,62.3 J10.11@4,62.3 4.424,61.876 6.412,61.876 6.538,61.75 v1(6.632,61.75) ; v1(8.252,53.463) v1@8.318,53.396 ; v1(17.626,63.191) 17.626,63.174 18.5,62.3 J11.11@20,62.3 19.576,61.876 17.882,61.876 17.726,61.72 v1(17.632,61.72)
  L4 w0.3: IC4.1@9.85,18.025 10.725,18.025 v2(10.9,18.2) 10.9,18.5 10.725,18.675 IC4.2@9.85,18.675 ; v2(12.5,19.8) 12.675,19.975 IC4.8@12.675,20.85 ; IC4.11@13.55,18.675 12.675,18.675 12.5,18.5 v2(12.5,18.2) 12.675,18.025 IC4.12@13.55,18.025 14.575,18.025 14.88,18.33 R7.1@14.9,18.33 ; C14.1@20.05,32.2 v1(20.05,32.95) ; IC3.3@20.9,26.2 v1(20.9,27.4)
  L4 w0.5: J10.7@3.3,70.3 v1(3.3,72) ; J10.7@4.7,70.3 v1(4.7,72) ; J11.7@19.3,70.3 v1(19.3,72) ; J11.7@20.7,70.3 v1(20.7,72)
  other v1: 1,1 6,1 11,1 16,1 21,1 18,6.5 1,9 6,9 1,16 15,16 22,16 4.9,20.9 4.9,21.6 8.5,21.7 17.7,24.3 14.3,24.5 15.4,26.2 17.5,28.1 9.5,29.6 6.7,32.2 5.6,32.5 18.1,33.7 5.4,33.8 11,34 5.4,34.5 8,35 15.1,35 6.9,38 12.9,38 15.3,38 20.7,38.3 21.7,38.3 3,39.9 2.4,40.3 9.702,44.599 12.044,44.599 14.227,44.7 13.375,45.6 10.92,45.73 6.6,46.1 9.568,49.376 12.044,49.376 14.33,49.376 21.4,58.9 11.3,62.8 8.7,65.2
  other v2: 11.7,19 10.9,19.8 8.5,24.3 9.5,24.3 9,25.2 8.5,26.1 9.5,26.1